# Altium PCB Main.PcbDoc (part 1 of 2)
Units mm, origin at the board's own origin, x right, y up, seen from the top; angles counter-clockwise.
Board outline 55 x 61 mm, 2 copper layers (Top Layer, Bottom Layer); 103 components, 75 nets, 531 pads, 187 vias.
Unrouted connection lines stored in the file: 83.
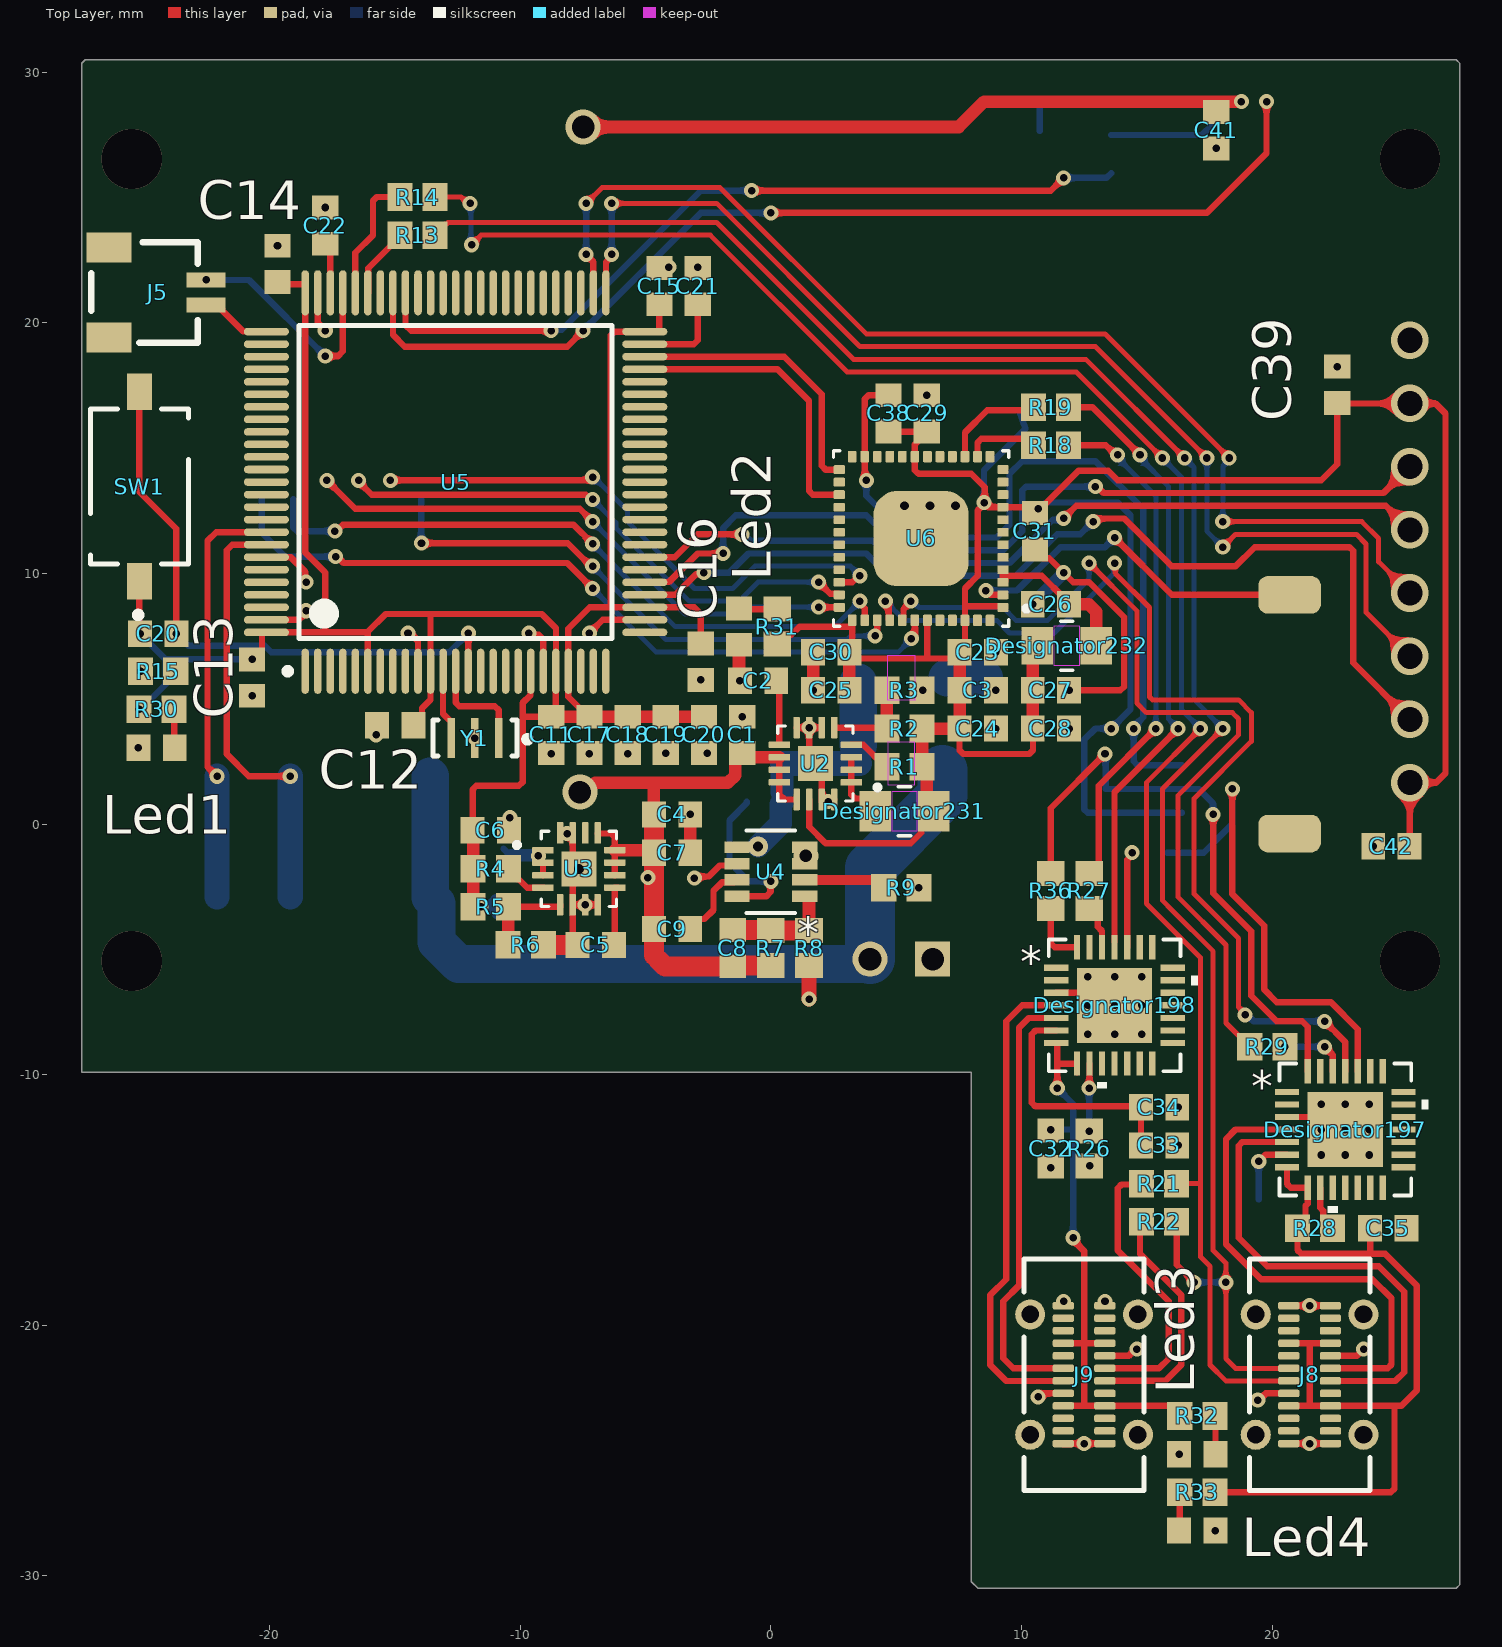
[diagram p0: Top Layer view]
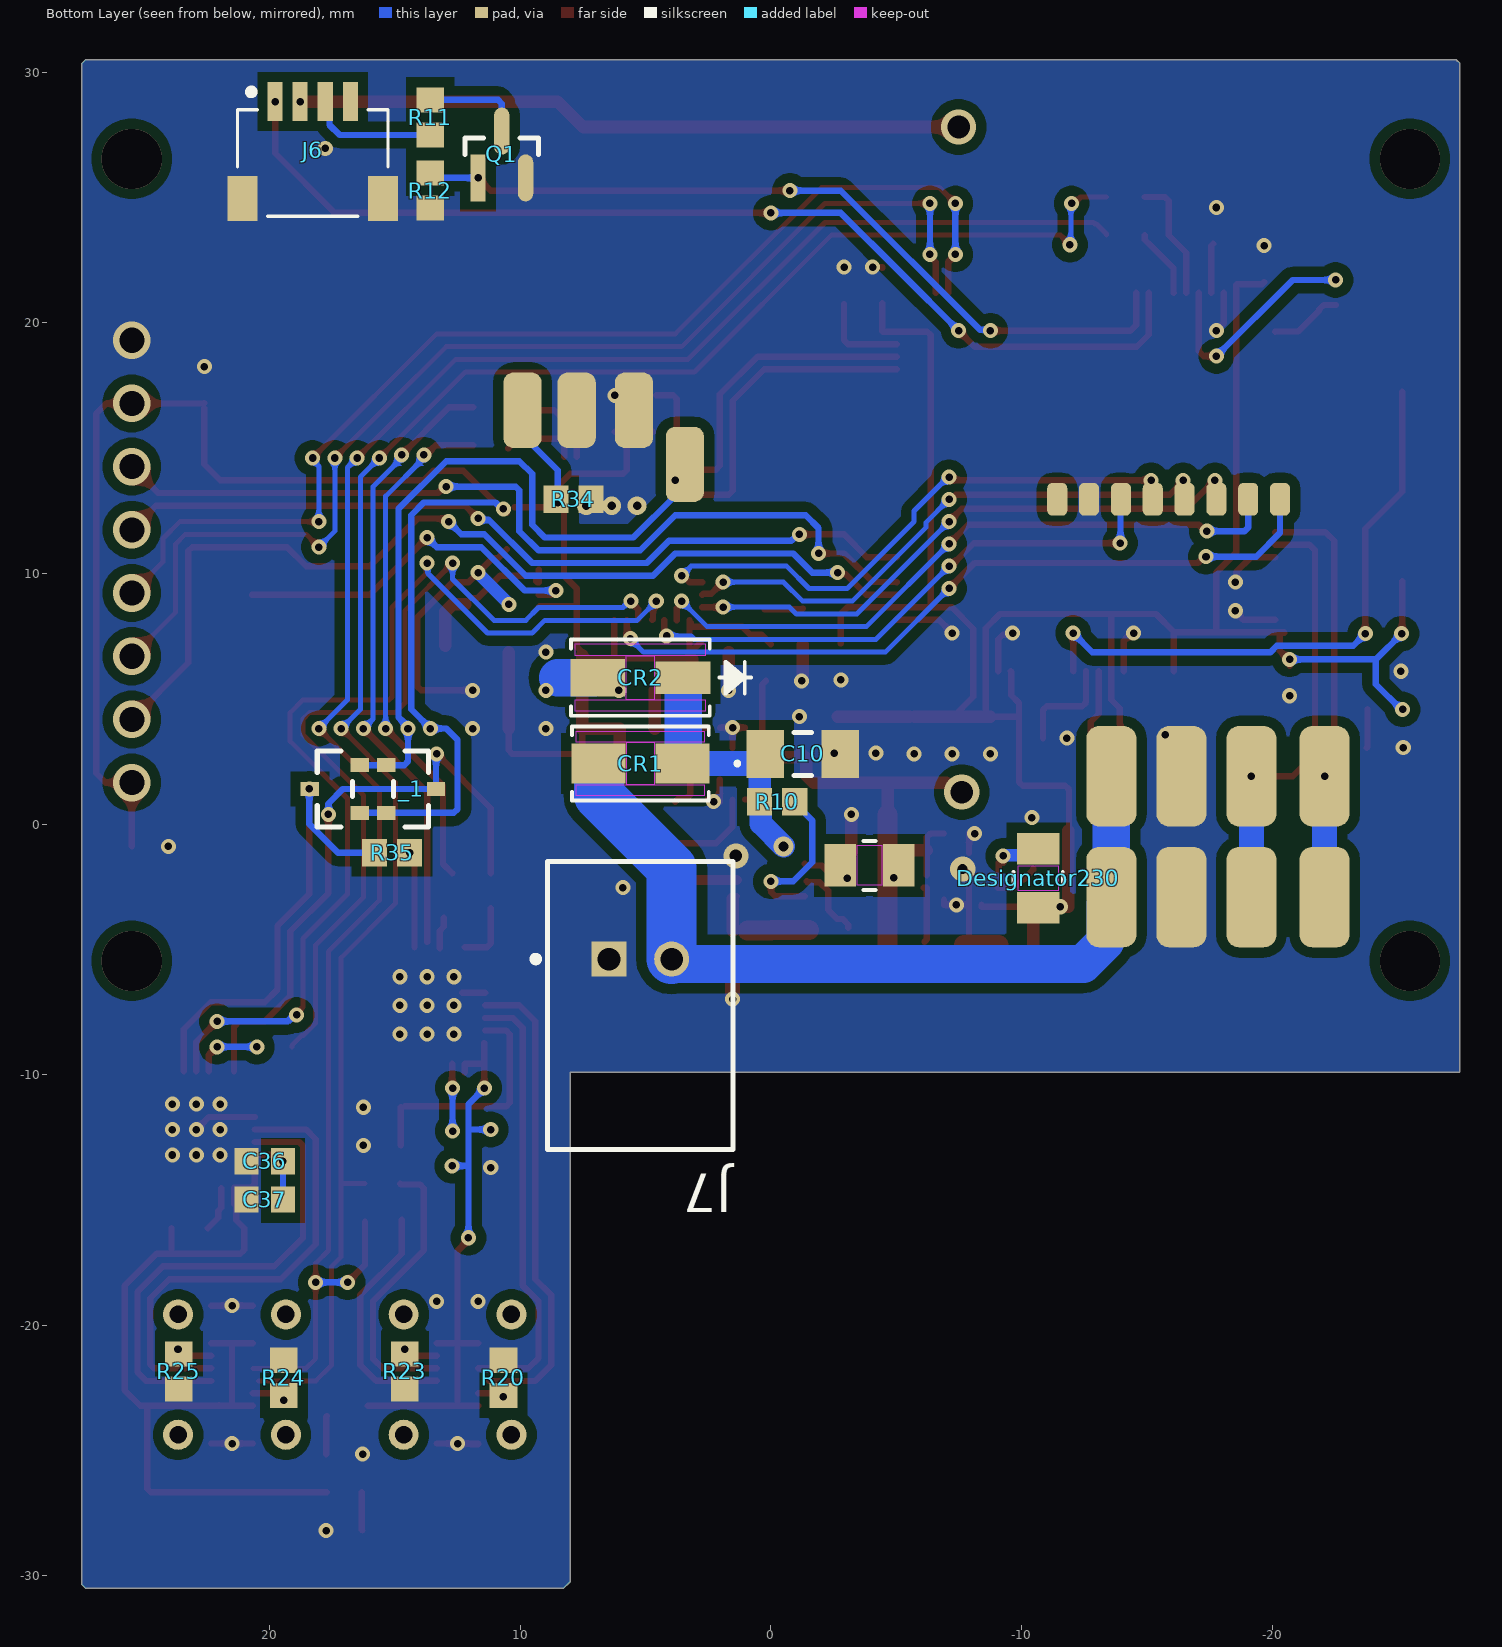
[diagram p1: Bottom Layer view, seen from below]

## Layer stack, top to bottom
Top Solder: solder mask 0.0102, Solder Resist, Dk 3.5
Top Layer: signal copper 0.0356
Dielectric 1: dielectric 0.32, FR-4, Dk 4.8
Bottom Layer: signal copper 0.0356
Bottom Solder: solder mask 0.0102, Solder Resist, Dk 3.5

## Board outline
-27.5,-9.906 8.001,-9.906 8.001,-30.234 8.267,-30.5 27.351,-30.5 27.5,-30.351 27.5,30.351 27.351,30.5 -27.353,30.5 -27.5,30.353

## Design rules (kind name [scope] priority, off if disabled: settings)
Clearance [All] p1: gap=0 ignorepadtopadclearanceinfootprint=TRUE
PolygonConnect [All] p1: connectstyle=Direct reliefconductorwidth=0.254 reliefentries=4 polygonreliefangle="90 Angle" airgapwidth=0.254
RoutingVias [All] p1: holewidth=0.711 width=1.27 viastyle="Through Hole" minholewidth=0 minwidth=0 maxholewidth=5 maxwidth=5
SolderMaskExpansion [All] p1: expansion=0.102 istentingtop=FALSE
Width [All] p1: maxlimit=5 minlimit=0.1 preferedwidth=0.254
30 further rules are at their usual default settings.

## Classes and differential pairs
component class Main: 0 C1 C2 C3 C4 C5 C6 C7 C8 C9 C11 C12 C13 C14 C15 C16 C17 C19 C20 C21 C22 C23 C24 C25 C26 C27 C28 C29 C30 C31 C32 C33 C34 C36 C37 CR2 J5 J6 J7 Q1 R1 R2 R3 R4 R5 R6 R7 R8 R9 R10 R11 R12 R13 R14 R15 R18 R19 R20 R21 R22 R23 R24 R25 R26 R27 R28 R29 SW1 U2 U3 U4 U5 U6 Y1

## Components (designator, comment, footprint, x,y, rotation, side; value= is the part's Value field where it differs from the comment)
_1 "Comment" FP-S-03946-MFG 14.351,1.397 r180 bottom
C1 "10uF" CAPC1608X90X35ML10T15 -1.143,3.556 r270 top
C2 "3.3nF" CAPC1608X90X35ML10T15 -0.508,5.715 r0 top
C3 "22uF" CAPC1608X90X35ML10T15 8.255,5.334 r180 top
C4 "100uF" CAPC1608X90X35ML10T15 -3.937,0.381 r180 top
C5 "3.3nF" CAPC1608X90X35ML10T15 -6.985,-4.826 r0 top
C6 "22uF" CAPC1608X90X35ML10T15 -11.176,-0.254 r180 top
C7 "0.1uF" CAPC1608X90X35ML10T15 -3.937,-1.143 r180 top
C8 "12pF" CAPC1608X90X35ML10T15 -1.524,-4.953 r270 top
C9 "10nF" CAPC1608X90X35ML10T15 -3.937,-4.191 r180 top
C10 "Comment" KEMT-1206-2_M -1.27,2.794 r180 bottom
C11 "0.1uF" CAPC1608X90X35ML10T15 -8.763,3.556 r90 top
C12 "0.1uF" CAPC1608X90X35ML10T15 -14.986,3.937 r0 top
C13 "0.1uF" CAPC1608X90X35ML10T15 -20.701,5.842 r90 top
C14 "0.1uF" CAPC1608X90X35ML10T15 -19.685,22.352 r270 top
C15 "0.1uF" CAPC1608X90X35ML10T15 -4.445,21.463 r270 top
C16 "0.1uF" CAPC1608X90X35ML10T15 -2.794,6.477 r90 top
C17 "1uF" CAPC1608X90X35ML10T15 -7.239,3.556 r90 top
C18 "0.1uF" CAPC1608X90X35ML10T15 -5.715,3.556 r90 top
C19 "1uF" CAPC1608X90X35ML10T15 -4.191,3.556 r90 top
C20 "0.1uF" CAPC1608X90X35ML10T15 -2.667,3.556 r90 top
C20 "0.1uF" CAPC1608X90X35ML10T15 -24.446,7.595 r180 top
C21 "0.1uF" CAPC1608X90X35ML10T15 -2.921,21.463 r270 top
C22 "0.1uF" CAPC1608X90X35ML10T15 -17.78,23.876 r270 top
C23 "0.1uF" CAPC1608X90X35ML10T15 8.255,6.858 r0 top
C24 "0.1uF" CAPC1608X90X35ML10T15 8.255,3.81 r0 top
C25 "0.1uF" CAPC1608X90X35ML10T15 2.413,5.334 r180 top
C26 "0.1uF" CAPC1608X90X35ML10T15 11.176,8.763 r0 top
C27 "1uF" CAPC1608X90X35ML10T15 11.176,5.334 r180 top
C28 "0.1uF" CAPC1608X90X35ML10T15 11.176,3.81 r180 top
C29 "0.1uF" CAPC1608X90X35ML10T15 6.223,16.383 r270 top
C30 "0.1uF" CAPC1608X90X35ML10T15 2.413,6.858 r0 top
C31 "1uF" CAPC1608X90X35ML10T15 10.541,11.684 r90 top
C32 "1uF" CAPC1608X90X35ML10T15 11.176,-12.954 r270 top
C33 "4.7uF" CAPC1608X90X35ML10T15 15.494,-12.827 r180 top
C34 "0.1uF" CAPC1608X90X35ML10T15 15.494,-11.303 r180 top
C35 "1uF" CAPC1608X90X35ML10T15 24.638,-16.129 r0 top
C36 "4.7uF" CAPC1608X90X35ML10T15 20.193,-13.462 r180 bottom
C37 "0.1uF" CAPC1608X90X35ML10T15 20.193,-14.986 r180 bottom
C38 "0.1uF" CAPC1608X90X35ML10T15 4.699,16.383 r270 top
C39 "4.7uF" CAPC1608X90X35ML10T15 22.606,17.526 r90 top
C41 "100uF" CAPC1608X90X35ML10T15 17.78,27.686 r270 top
C42 "4.7uF" CAPC1608X90X35ML10T15 24.765,-0.889 r0 top
CR1 "SS54-HF" SDO_DO-214AC_CIP 5.207,2.413 r0 bottom
CR2 "SMAJ30CA" SMASeries_LTF 5.207,5.842 r0 bottom
Designator197 "Comment" QFN28_5X5_SIL 22.924,-12.192 r0 top
Designator198 "Comment" QFN28_5X5_SIL 13.716,-7.239 r0 top
Designator230 "Comment" IND_EPCOS_B82498F_EPC#1 -10.668,-2.159 r90 bottom
Designator231 "Comment" IND_EPCOS_B82498F_EPC#2 5.334,0.508 r0 top
Designator232 "Comment" IND_EPCOS_B82498F_EPC#3 11.811,7.112 r0 top
J5 "Debug" SM02B-SRSS-TB(LF)(SN) -24.511,21.209 r270 top
J6 "SM04B-SRSS-TB(LF)(SN)" JST_SM04B-SRSS-TB(LF)(SN) 18.28,28.829 r180 bottom
J7 "S2B-XH-A-1(LF)(SN)" FP-S2B-XH-A-1_LF_SN-MFG 5.207,-7.239 r0 bottom
J8 "USB-TYPE-C-STAND" USB-TYPE-C-STAND 21.5,-21.971 r90 top
J9 "USB-TYPE-C-STAND" USB-TYPE-C-STAND 12.5,-21.971 r270 top
Led1 "22uF" CAPC1608X90X35ML10T15 -24.511,3.048 r0 top
Led2 "0.1uF" CAPC1608X90X35ML10T15 -1.27,7.874 r90 top
Led3 "1uF" CAPC1608X90X35ML10T15 17.018,-25.146 r0 top
Led4 "1uF" CAPC1608X90X35ML10T15 17.018,-28.194 r0 top
Q1 "IRFML8244TRPBF" FP-PG-SOT23-3-IPC_A 10.734,26.716 r90 bottom
R1 "100K" RESC1608X55X30ML20T20 5.334,2.286 r0 top
R2 "680K" RESC1608X55X30ML20T20 5.334,3.81 r180 top
R3 "130K" RESC1608X55X30ML20T20 5.334,5.334 r180 top
R4 "100K" RESC1608X55X30ML20T20 -11.176,-1.778 r180 top
R5 "680K" RESC1608X55X30ML20T20 -11.176,-3.302 r0 top
R6 "130K" RESC1608X55X30ML20T20 -9.779,-4.826 r180 top
R7 "110K" RESC1608X55X30ML20T20 0,-4.953 r270 top
R8 "15K" RESC1608X55X30ML20T20 1.524,-4.953 r90 top
R9 "47k" RESC1608X55X30ML20T20 5.207,-2.54 r180 top
R10 "47K" RESC1608X55X30ML20T20 -0.254,0.889 r0 bottom
R11 "22R" RESC1608X55X30ML20T20 13.589,28.194 r90 bottom
R12 "22R" RESC1608X55X30ML20T20 13.589,25.273 r270 bottom
R13 "22R" RESC1608X55X30ML20T20 -14.097,23.495 r180 top
R14 "22R" RESC1608X55X30ML20T20 -14.097,25.019 r180 top
R15 "10K" RESC1608X55X30ML20T20 -24.446,6.096 r0 top
R18 "0R" RESC1608X55X30ML20T20 11.176,15.113 r0 top
R19 "0R" RESC1608X55X30ML20T20 11.176,16.637 r0 top
R20 "5.1k" RESC1608X55X30ML20T20 10.668,-22.098 r90 bottom
R21 "0R" RESC1608X55X30ML20T20 15.494,-14.351 r180 top
R22 "0R" RESC1608X55X30ML20T20 15.494,-15.875 r180 top
R23 "5.1k" RESC1608X55X30ML20T20 14.605,-21.844 r90 bottom
R24 "5.1k" RESC1608X55X30ML20T20 19.431,-22.098 r90 bottom
R25 "5.1k" RESC1608X55X30ML20T20 23.622,-21.844 r90 bottom
R26 "4.7k" RESC1608X55X30ML20T20 12.7,-12.954 r90 top
R27 "200R" RESC1608X55X30ML20T20 12.7,-2.667 r90 top
R28 "4.7k" RESC1608X55X30ML20T20 21.717,-16.129 r0 top
R29 "200R" RESC1608X55X30ML20T20 19.812,-8.89 r180 top
R30 "130K" RESC1608X55X30ML20T20 -24.511,4.572 r180 top
R31 "130K" RESC1608X55X30ML20T20 0.254,7.874 r90 top
R32 "130K" RESC1608X55X30ML20T20 17.018,-23.622 r0 top
R33 "130K" RESC1608X55X30ML20T20 17.018,-26.67 r0 top
R34 "0R" RESC1608X55X30ML20T20 7.874,12.954 r0 bottom (schematic designator R19)
R35 "0R" RESC1608X55X30ML20T20 15.113,-1.143 r0 bottom (schematic designator R21)
R36 "200R" RESC1608X55X30ML20T20 11.176,-2.667 r90 top (schematic designator R27)
SW1 "PTS636 SKG25 SMTR LFS" FP-PTS636_SKG25_SMTR_LFS-MFG -25.195,13.467 r90 top
U2 "TLV62130RGTR" QFN50P300X300X100-17N#1 1.778,2.413 r180 top
U3 "TLV62130RGTR" QFN50P300X300X100-17N#2 -7.658,-1.79 r0 top
U4 "SY8303AIC" TSOT_303AIC_SGY 0,-1.905 r180 top
U5 "STM32F407VET6" STM-LQFP100_N -12.579,13.646 r90 top
U6 "ESP32-PICO-D4" PQFN50P700X700X104-49N 5.997,11.393 r180 top
Y1 "" FP-CSTCE_V-MFG -11.811,3.429 r180 top
? "Comment" FP-S-03946-MFG 17.399,1.397 r0 bottom
? "Comment" IND_EPCOS_B82498F_EPC#1 -3.937,-1.651 r180 bottom

## Footprints (in the part's own frame and the unit in brackets; to place one, negate y for a bottom-side part, rotate by r counter-clockwise, add the part's x,y. Pads: shape width x height; smd on the part's side, far side on the other; paste and mask are expansions set on the pad)
CAPC1608X90X35ML10T15 [mm] "Chip Capacitor, 2-Leads, Body 1.60x0.80mm, IPC Low Density"
  rect 0.95x1.05 smd: 1(-0.725,0) 2(0.725,0)
  body extent -0.85,-0.45 0.85,0.45, height 0.9
FP-CSTCE_V-MFG [mm]
  rect 0.3x1.6 smd paste+0 mask+0: 1(-0.95,0) 2(0,0) 3(0.95,0)
  silkscreen extent -2.23,-0.72 1.68,0.72, body extent -1.78,-0.9 1.78,0.9, height 0.25
FP-PG-SOT23-3-IPC_A [mm]
  rect 1.874x0.612 smd paste+0 mask+0: 1(-0.935,0.95)
  rrect100% 1.874x0.612 smd paste+0 mask+0: 2(-0.935,-0.95) 3(0.935,0)
  silkscreen extent 0,-1.46 0.65,1.46, body extent -1.18,-1.46 1.18,1.46, height 1.12
FP-PTS636_SKG25_SMTR_LFS-MFG [mm]
  rect 1.45x1 smd paste+0 mask+0: 1(-3.775,0) 2(3.775,0)
  silkscreen extent -5.25,-1.95 3.1,1.95, body extent -4.6,-2.05 4.6,2.05, height 0.25
FP-S2B-XH-A-1_LF_SN-MFG [mm]
  rect 1.4x1.4 hole 0.9 paste-1000 mask+0: 1(1.25,-1.85)
  round 1.4 hole 0.9 paste-1000 mask+0: 2(-1.25,-1.85)
  silkscreen extent -3.7,-5.75 4.3,5.75, body extent -3.7,-5.75 3.7,5.75, height 5.99
FP-S-03946-MFG [mil]
  rect 29x22 smd paste+0 mask+0: 1(-39,37.5) 2(-39,-37.5) 3(39,0)
  silkscreen extent -28,-60 28,60, body extent -47,-57 47,57, height 44
IND_EPCOS_B82498F_EPC#1 [mil]
  rect 49.5x67 smd paste+0 mask+0: 1(-46.25,0) 2(46.25,0)
  Top Layer keep-out region: -19.5,-31.5 -19.5,31.5 19.5,31.5 19.5,-31.5
  silkscreen extent -9,-38 9,38, body extent -46,-34 46,34, height 55
IND_EPCOS_B82498F_EPC#2 [mil]
  rect 49.5x62.99 smd paste+0 mask+0: 1(-46.25,0) 2(46.25,0)
  Top Layer keep-out region: -19.5,-31.5 -19.5,31.5 19.5,31.5 19.5,-31.5
  silkscreen extent -9,-38 9,38, body extent -46,-34 46,34, height 55
IND_EPCOS_B82498F_EPC#3 [mil]
  rect 49.5x59.06 smd paste+0 mask+0: 1(-46.25,0) 2(46.25,0)
  Top Layer keep-out region: -19.5,-31.5 -19.5,31.5 19.5,31.5 19.5,-31.5
  silkscreen extent -9,-38 9,38, body extent -46,-34 46,34, height 55
JST_SM04B-SRSS-TB(LF)(SN) [mm]
  rect 0.6x1.55 smd: 1(-1.5,0) 2(-0.5,0) 3(0.5,0) 4(1.5,0)
  rect 1.2x1.8 smd: S1(-2.8,-3.875) S2(2.8,-3.875)
  silkscreen extent -3,-4.57 3,0.48
KEMT-1206-2_M [mm] "SMD, 2-Leads, Body 3.4x1.8mm, IPC Low Density"
  rect 1.5x1.9 smd: 1(-1.5,0) 2(1.5,0)
  silkscreen extent -0.35,-0.85 0.35,0.85, body extent -1.7,-0.9 1.7,0.9, height 0.88
PQFN50P700X700X104-49N [mm]
  rrect25% 0.45x0.35 smd: 1(-3.265,2.75) 2(-3.265,2.25) 3(-3.265,1.75) 4(-3.265,1.25) 5(-3.265,0.75) 6(-3.265,0.25) 7(-3.265,-0.25) 8(-3.265,-0.75) 9(-3.265,-1.25) 10(-3.265,-1.75) 11(-3.265,-2.25) 12(-3.265,-2.75) 25(3.265,-2.75) 26(3.265,-2.25) 27(3.265,-1.75) 28(3.265,-1.25) 29(3.265,-0.75) 30(3.265,-0.25) 31(3.265,0.25) 32(3.265,0.75) 33(3.265,1.25) 34(3.265,1.75) 35(3.265,2.25) 36(3.265,2.75)
  rrect25% 0.35x0.45 smd: 13(-2.75,-3.265) 14(-2.25,-3.265) 15(-1.75,-3.265) 16(-1.25,-3.265) 17(-0.75,-3.265) 18(-0.25,-3.265) 19(0.25,-3.265) 20(0.75,-3.265) 21(1.25,-3.265) 22(1.75,-3.265) 23(2.25,-3.265) 24(2.75,-3.265) 37(2.75,3.265) 38(2.25,3.265) 39(1.75,3.265) 40(1.25,3.265) 41(0.75,3.265) 42(0.25,3.265) 43(-0.25,3.265) 44(-0.75,3.265) 45(-1.25,3.265) 46(-1.75,3.265) 47(-2.25,3.265) 48(-2.75,3.265)
  rrect50% 3.8x3.8 smd paste-4: 49(0,0)
  silkscreen extent -4.3,-3.5 3.5,3.5
QFN28_5X5_SIL [mil]
  rect 38x10 smd paste+0 mask+0: 1(-91.5,59.06) 2(-91.5,39.37) 3(-91.5,19.68) 4(-91.5,0) 5(-91.5,-19.68) 6(-91.5,-39.37) 7(-91.5,-59.06) 15(91.5,-59.06) 16(91.5,-39.37) 17(91.5,-19.68) 18(91.5,0) 19(91.5,19.68) 20(91.5,39.37) 21(91.5,59.06)
  rect 10x38 smd paste+0 mask+0: 8(-59.06,-91.5) 9(-39.37,-91.5) 10(-19.69,-91.5) 11(0,-91.5) 12(19.69,-91.5) 13(39.37,-91.5) 14(59.06,-91.5) 22(59.06,91.5) 23(39.37,91.5) 24(19.69,91.5) 25(0,91.5) 26(-19.69,91.5) 27(-39.37,91.5) 28(-59.06,91.5)
  rect 118.11x118.11 smd paste-66 mask+0: 29(0,0)
  silkscreen extent -104,-130 130,104, body extent -99,-99 99,99, height 39
QFN50P300X300X100-17N#1 [mm]
  rrect25% 0.86x0.26 smd: 1(-1.435,0.75) 2(-1.435,0.25) 3(-1.435,-0.25) 4(-1.435,-0.75) 9(1.435,-0.75) 10(1.435,-0.25) 11(1.435,0.25) 12(1.435,0.75)
  rrect25% 0.26x0.86 smd: 5(-0.75,-1.435) 6(-0.25,-1.435) 7(0.25,-1.435) 8(0.75,-1.435) 13(0.75,1.435) 14(0.25,1.435) 15(-0.25,1.435) 16(-0.75,1.435)
  rect 1.4x1.4 smd paste-2: 17(0,0)
  round 0.4 smd mask+0: 18(0,0)
  oval 0x0.4 smd mask+0: 19(-0.58,0.58) 20(0.58,0.58) 21(-0.58,-0.58) 22(0.58,-0.58)
  silkscreen extent -2.57,-1.5 1.5,1.5
QFN50P300X300X100-17N#2 [mm]
  rrect25% 0.86x0.26 smd: 1(-1.435,0.75) 2(-1.435,0.25) 3(-1.435,-0.25) 4(-1.435,-0.75) 9(1.435,-0.75) 10(1.435,-0.25) 11(1.435,0.25) 12(1.435,0.75)
  rrect25% 0.26x0.86 smd: 5(-0.75,-1.435) 6(-0.25,-1.435) 7(0.25,-1.435) 8(0.75,-1.435) 13(0.75,1.435) 14(0.25,1.435) 15(-0.25,1.435) 16(-0.75,1.435)
  rect 1.4x1.4 smd paste-2: 17(0,0)
  oval 0x0.4 smd mask+0: 18(0,0)
  silkscreen extent -2.57,-1.5 1.5,1.5
RESC1608X55X30ML20T20 [mm] "Chip Resistor, 2-Leads, Body 1.60x0.80mm, IPC Low Density"
  rect 1x1.1 smd: 1(-0.7,0) 2(0.7,0)
  body extent -0.9,-0.5 0.9,0.5, height 0.55
SDO_DO-214AC_CIP [mil]
  rect 85x63 smd paste+0 mask+0: 1(-66,0) 2(66,0)
  Top Layer keep-out region: -21.5,-33.5 -21.5,33.5 21.5,33.5 21.5,-33.5
  Top Layer keep-out region: -100.5,33.5 -100.5,51 100.5,51 100.5,33.5
  Top Layer keep-out region: -100.5,-51 -100.5,-33.5 100.5,-33.5 100.5,-51
  Keep-Out Layer region: -21.5,-33.5 -21.5,33.5 21.5,33.5 21.5,-33.5
  silkscreen extent -155,-58 108,58, body extent -103,-53 103,53, height 89
SM02B-SRSS-TB(LF)(SN) [mm]
  rect 0.6x1.55 smd: 1(-0.5,1.975) 2(0.5,1.975)
  rect 1.2x1.8 smd: 3(-1.8,-1.9) 4(1.8,-1.9)
  silkscreen extent -2,-2.6 2,1.65
SMASeries_LTF [mil]
  rect 86x51.18 smd paste+0 mask+0: 1(-67,0)
  rect 86x59.06 smd paste+0 mask+0: 2(67,0)
  Top Layer keep-out region: -22,-34.5 -22,34.5 22,34.5 22,-34.5
  Top Layer keep-out region: -102,34.5 -102,53 102,53 102,34.5
  Top Layer keep-out region: -102,-53 -102,-34.5 102,-34.5 102,-53
  Keep-Out Layer region: -22,-34.5 -22,34.5 22,34.5 22,-34.5
  silkscreen extent -174,-60 109,60, body extent -104,-55 104,55, height 92
STM-LQFP100_N [mm] "Thin QFP, 100-Leads, Body 14x14mm, Pitch 0.5mm, IPC Medium Density"
  oval 1.8x0.3 smd: 1(-7.55,6) 2(-7.55,5.5) 3(-7.55,5) 4(-7.55,4.5) 5(-7.55,4) 6(-7.55,3.5) 7(-7.55,3) 8(-7.55,2.5) 9(-7.55,2) 10(-7.55,1.5) 11(-7.55,1) 12(-7.55,0.5) 13(-7.55,0) 14(-7.55,-0.5) 15(-7.55,-1) 16(-7.55,-1.5) 17(-7.55,-2) 18(-7.55,-2.5) 19(-7.55,-3) 20(-7.55,-3.5) 21(-7.55,-4) 22(-7.55,-4.5) 23(-7.55,-5) 24(-7.55,-5.5) 25(-7.55,-6) 51(7.55,-6) 52(7.55,-5.5) 53(7.55,-5) 54(7.55,-4.5) 55(7.55,-4) 56(7.55,-3.5) 57(7.55,-3) 58(7.55,-2.5) 59(7.55,-2) 60(7.55,-1.5) 61(7.55,-1) 62(7.55,-0.5) 63(7.55,0) 64(7.55,0.5) 65(7.55,1) 66(7.55,1.5) 67(7.55,2) 68(7.55,2.5) 69(7.55,3) 70(7.55,3.5) 71(7.55,4) 72(7.55,4.5) 73(7.55,5) 74(7.55,5.5) 75(7.55,6)
  oval 0.3x1.8 smd: 26(-6,-7.55) 27(-5.5,-7.55) 28(-5,-7.55) 29(-4.5,-7.55) 30(-4,-7.55) 31(-3.5,-7.55) 32(-3,-7.55) 33(-2.5,-7.55) 34(-2,-7.55) 35(-1.5,-7.55) 36(-1,-7.55) 37(-0.5,-7.55) 38(0,-7.55) 39(0.5,-7.55) 40(1,-7.55) 41(1.5,-7.55) 42(2,-7.55) 43(2.5,-7.55) 44(3,-7.55) 45(3.5,-7.55) 46(4,-7.55) 47(4.5,-7.55) 48(5,-7.55) 49(5.5,-7.55) 50(6,-7.55) 76(6,7.55) 77(5.5,7.55) 78(5,7.55) 79(4.5,7.55) 80(4,7.55) 81(3.5,7.55) 82(3,7.55) 83(2.5,7.55) 84(2,7.55) 85(1.5,7.55) 86(1,7.55) 87(0.5,7.55) 88(0,7.55) 89(-0.5,7.55) 90(-1,7.55) 91(-1.5,7.55) 92(-2,7.55) 93(-2.5,7.55) 94(-3,7.55) 95(-3.5,7.55) 96(-4,7.55) 97(-4.5,7.55) 98(-5,7.55) 99(-5.5,7.55) 100(-6,7.55)
  silkscreen extent -7.67,-6.25 6.25,6.82, body extent -7,-7 7,7, height 1.6
TSOT_303AIC_SGY [mil]
  rect 39.5x18 smd paste+0 mask+0: 1(-53.25,38.39) 2(-53.25,12.8) 3(-53.25,-12.8) 4(-53.25,-38.39) 5(53.25,-38.39) 6(53.25,-12.8) 7(53.25,12.8) 8(53.25,38.39)
  silkscreen extent -39,-65 39,65, body extent -59,-60 59,60, height 43
USB-TYPE-C-STAND [mm]
  rrect50% 0.3x0.85 smd: A1(-2.75,0.83) A2(-2.25,0.83) A3(-1.75,0.83) A4(-1.25,0.83) A5(-0.75,0.83) A6(-0.25,0.83) A7(0.25,0.83) A8(0.75,0.83) A9(1.25,0.83) A10(1.75,0.83) A11(2.25,0.83) A12(2.75,0.83) B1(2.75,-0.83) B2(2.25,-0.83) B3(1.75,-0.83) B4(1.25,-0.83) B5(0.75,-0.83) B6(0.25,-0.83) B7(-0.25,-0.83) B8(-0.75,-0.83) B9(-1.25,-0.83) B10(-1.75,-0.83) B11(-2.25,-0.83) B12(-2.75,-0.83)
  round 1.2 hole 0.7: S1(-2.4,2.15) S2(2.4,2.15) S3(-2.4,-2.15) S4(2.4,-2.15)
  silkscreen extent -4.62,-2.4 4.62,2.4, body extent -4.52,-2.3 4.52,2.3, height 7.39

## Part data
C1 C2 C3 C4 C5 C6 C7 C8 C9 C11 C12 C13 C14 C15 C16 C17 C18 C19 C20 C20 C21 C22 C23 C24 C25 C26 C27 C28 C29 C30 C31 C32 C33 C34 C35 C36 C37 C38 C39 C41 C42 Led1 Led2 Led3 Led4: library part CMP-2006-02924-1, Manufacturer=Murata, PART NUMBER=GRM188R71H472KA01D
C10: library part CMP-2006-02924-1
CR1: "No Description Available", Mfr_Name=Comchip, Type="Diodes - Rectifiers, Single"
CR2: "No Description Available", Mfr_Name="Littelfuse Inc"
J5: library part SM02B-SRSS-TB(LF)(SN), "Connector Header Surface Mount, Right Angle 2 position 0.039 _1.00mm_", Package=None, Availability=Unavailable, MF="JST Sales", MP=SM02B-SRSS-TB_LF__SN_, Price=None, SnapEDA_Link=https://www.snapeda.com/parts/SM02B-SRSS-TB%28LF%29%28SN%29/JST%20Sales%20America%20Inc./view-part/447499/?ref=snap
J6: "SH Series 1.0 mm Pitch 2 Position Single Row Side Entry Shrouded Header", Package=None, Availability=Unavailable, MP=SM04B-SRSS-TB(LF)(SN), Price=None
J7: library part CMP-17439-000260-1, "CONN HEADER R/A 2POS 2.5MM", Flammability Rating="UL94 V-0", Insulation Color=Natural, Max Operating Temperature=85°C, Min Operating Temperature=-25°C, Voltage Rating=250V, Connector Type=Header, Contact Finish - Mating=TIN, Contact Material=Brass, Contact Shape=Square, Contact Type="Male Pin", Fastening Type=Detent, Insulation Material=Nylon, Lead Free="Lead Free", Mount="Through Hole", Number of Positions=2, Number of Rows=1, Packaging=Bulk, Series=XH, Termination=Press-Fit
J8 J9: Package=None, Availability=Unavailable, DigiKey-Purchase-URL=https://snapeda.com/shop?store=DigiKey&id=3596593, MF="Wurth Electronics", MP=632722110112, Price=None, SnapEDA_Link=https://www.snapeda.com/parts/632722110112/Wurth%20Electronics%20Inc./view-part/3596593/?ref=snap
Q1: library part CMP-00196-65874012-1, "IRFML8244TRPBF Trans MOSFET N-CH 25V 5.8A 3-Pin SOT-23 T/R - Product that comes on tape, but is not reeled", Case/Package=SOT-23, Continuous Drain Current (ID)=5.8A, Drain to Source Breakdown Voltage=25V, Drain to Source Resistance=41mΩ, Gate to Source Voltage (Vgs)=20V, Input Capacitance=430pF, Manufacturer Package Identifier=Micro3, Max Junction Temperature (Tj)=150°C, Max Power Dissipation=1.25W, Min Operating Temperature=-55°C, On-State Resistance=24mΩ, Package Quantity=3000, Resistance=41MΩ, Threshold Voltage=1.7V, Drain to Source Voltage (Vdss)=25V, Element Configuration=Single, Fall Time=2.9ns, Height=1.02mm, Lead Free="Lead Free", Length=3.04mm, Lifecycle Status=Production, Max Operating Temperature=150°C, Mount="Surface Mount", NexarPartId=65874012, Nominal Vgs=1.7V, Number of Elements=1, Number of Pins=3, Packaging="Tape & Reel", Power Dissipation=1.25W, Radiation Hardening=No, Rds On Max=24mΩ, REACH SVHC="No SVHC", Recovery Time=17ns, Rise Time=2.1ns, RoHS=Compliant, Schedule B="8541290080, 8541290080", Turn-Off Delay Time=9ns, Turn-On Delay Time=2.7ns, Width=1.4mm
R1 R2 R3 R4 R5 R6 R7 R8 R9 R10 R11 R12 R13 R14 R15 R18 R19 R20 R21 R22 R23 R24 R25 R26 R27 R28 R29 R30 R31 R32 R33 R34 R35 R36: library part CMP-2000-00054-1, Manufacturer=Panasonic, PART NUMBER=ERA3AEB392V
SW1: library part CMP-10040-000025-1, "TACT 6.0 X 3.5, 2.5 MM H, 250GF,"
U2 U3: "3-17V 3A Step-Down Converter in 3x3 QFN Package 16-VQFN -40 to 85", Package="VQFN-16 Texas Instruments", Availability=Unavailable, DigiKey-Purchase-URL=https://snapeda.com/shop?store=DigiKey&id=423292, MF="Texas Instruments", Mouser-Purchase-URL=https://snapeda.com/shop?store=Mouser&id=423292, MP=TLV62130RGTR, Price=None, SnapEDA_Link=https://www.snapeda.com/parts/TLV62130RGTR/Texas%20Instruments/view-part/423292/?ref=snap, Texas_Instruments-Purchase-URL=https://snapeda.com/shop?store=Texas+Instruments&id=423292
U4: "No Description Available", Mfr_Name=Silergy, RefDes=RefDes, Type=Type
U5: "ARM Cortex-M4 32-bit MCU+FPU, 210 DMIPS, 512 kB Flash, 192 kB Internal RAM, 82 I/Os, 100-pin LQFP, -40 to 85 degC, Tray", I/Os (High Current)=82, Manufacturer=STMicroelectronics, Operating Frequency(F) (Processor speed) (MHz)=168, Supplier Part Number 1=497-12075-ND, Supply Voltage(Vcc) max (V)=3.6, Supply Voltage(Vcc) min (V)=1.8, ComponentLink1Description="Manufacturer URL", ComponentLink1URL=http://www.st.com/web/en/home.html, ComponentLink2Description=Datasheet, ComponentLink2URL=http://www.st.com/st-web-ui/static/active/en/resource/technical/document/datasheet/DM00037051.pdf, ComponentLink3Description="Package Specification", ComponentLink3URL=http://www.st.com/st-web-ui/static/active/en/resource/technical/document/data_brief/DM00071938.pdf, Core="ARM Cortex-M4", D/A Converter=2x12-bit, DatasheetVersion="Rev. 4", FLASH Size (Prog) (kB)=512, Internal RAM Size (kB)=192, Mounting Technology="Surface Mount", PackageDescription="100-Pin Low Profile Quad Flat Package, 14 x 14 mm Body, 0.5 mm Pitch", PackageReference=LQFP100, PackageVersion="Rev. 1, 06/2013", Packing=Tray, PartNumber=STM32F407VET6, Supplier 1=Digi-Key, Supplier 2=Farnell, Supplier 3=Newark, Supplier 4=Mouser, Supplier Part Number 2=2064367, Supplier Part Number 3=73T2332, Supplier Part Number 4=511-STM32F407VET6
U6: "Bluetooth, WiFi 802.11b/g/n, Bluetooth v4.2 +EDR, Class 1, 2 and 3 Transceiver Module 2.4GHz ~ 2.5GHz Surface Mount", Package=None, Availability=Unavailable, MP=ESP32-PICO-D4, Price=None
Y1: library part CMP-06057-000013-1, "CERAMIC RES 20.0000MHZ 15PF SMD", Capacitance=15pF, Case/Package=SMD/SMT, Frequency=20MHz, Frequency Stability=0.3%, Frequency Tolerance=0.5%, Max Operating Temperature=80°C, Min Operating Temperature=-20°C, Package Quantity=3000, Resistor Type=Ceramic, Contact Plating=Gold, Height=0.039inch, Impedance=40R, Lead Free="Lead Free", Length=0.126inch, Load Capacitance=15pF, Mount="Surface Mount", Number of Pins=3, Packaging="Tape and Reel", REACH SVHC="No SVHC", Self Resonant Frequency=20MHz, Termination=SMD/SMT, Tolerance=0.5%, Width=0.051inch

## Free pads (board coordinates)
  rrect50% 2x4 smd far side: 2(-22.098,-2.921) 2(-22.098,1.905) 2(-19.177,-2.921) 2(-19.177,1.905) 2(-16.383,-2.921) 2(-16.383,1.905) 2(-13.589,-2.921) 2(-13.589,1.905)
  rrect50% 0.8x1.3 smd far side: 3(-20.32,12.954) 3(-19.05,12.954) 3(-17.78,12.954) 3(-16.51,12.954) 3(-15.24,12.954) 3(-13.97,12.954) 3(-12.7,12.954) 3(-11.43,12.954)
  rrect50% 1.524x3 smd far side: 4(3.429,14.351) 4(5.461,16.51) 4(7.747,16.51) 4(9.906,16.51)
  rrect50% 2.5x1.5 smd: 5(20.701,-0.381) 5(20.701,9.144)

## Via types
v1: diameter 0.6, hole 0.3, Top Layer to Bottom Layer, 167 vias
v2: diameter 1.5, hole 1, Top Layer to Bottom Layer, 8 vias
v3: diameter 2.4, hole 2.4, Top Layer to Bottom Layer, 4 vias
v4: diameter 0.75, hole 0.35, Top Layer to Bottom Layer, 3 vias
v5: diameter 1.4, hole 0.9, Top Layer to Bottom Layer, 2 vias
v6: diameter 1, hole 0.4, Top Layer to Bottom Layer, 1 vias
v7: diameter 0.8, hole 0.4, Top Layer to Bottom Layer, 1 vias
v8: diameter 1, hole 0.5, Top Layer to Bottom Layer, 1 vias

## Nets (pads, with @x,y where several pads share a name; then routed paths per layer and width w, separated by ;. In a path a pad name is that pad's centre, name@x,y a point inside that pad or via, vN(x,y) a via of type N, cw(c..) or ccw(c..) an arc to the next point about the centre after c; other vN are vias at no path point)
BOOT: ?.2@16.408,2.349 _1.1 C38.1 pad.4@3.429,14.351 U6.23 | length 32
  Top Layer w0.254: v1(3.81,13.716) 3.747,13.779 U6.23 3.747,16.959 3.896,17.108 C38.1@4.572,17.108
  Bottom Layer w0.254: v1(3.81,13.716) 3.81,13.103 5.483,11.43 9.017,11.43 9.525,11.938 9.525,13.97 10.033,14.478 12.954,14.478 14.859,12.573 14.859,4.259 14.478,3.878 v1(14.478,3.81) 14.478,2.498 14.627,2.349 _1.1 ?.2@16.408,2.349
CAN2_RX: 
CAN2_TX: 
CANH: 
CANL: 
DO: J6.4
DTR: _1.3 Designator197.28 Designator198.28 R36.1 R36.2 | length 26.9
  Top Layer w0.254: R36.1 11.176,-4.766 11.325,-4.915 Designator198.28 ; R36.2 11.176,0.635 v1(13.335,2.794) ; v1(17.653,0.381) 17.653,-2.757 19.177,-4.281 19.177,-6.858 20.193,-7.874 21.209,-7.874 21.424,-8.089 Designator197.28
  Bottom Layer w0.254: v1(13.335,2.794) 13.36,2.769 _1.3 17.079,1.397 17.646,0.829 17.646,0.388 v1(17.653,0.381)
DTR_2: 
ESP_EN: ?.1@16.408,0.445 _1.2 C3.2 C23.1 C24.1 C25.1 C27.2 C28.2 C29.2 C30.2 C31.2 C38.2 C39.1 C42.2 Designator231.2 Designator232.1 pad.4@9.906,16.51 R1.2 R2.1 R31.1 R34.2 U2.14 U6.1 U6.9 U6.19 U6.37 U6.43 U6.46 | length 114.7
  Top Layer w0.254: R31.1@0,7.174 0.373,7.547 0.816,7.547 1.143,7.874 3.175,7.874 3.247,7.802 ; U2.14 1.528,-0.105 2.185,-0.762 5.588,-0.762 6.007,-0.343 6.007,-0.089 Designator231.2@6.223,0.127 ; C30.2@2.79,7.256 3.138,6.908 C30.2 3.247,6.967 3.247,7.802 ; C30.2@3.138,6.567 C30.2@3.175,6.604 ; C30.2@3.138,6.604 C30.2@3.175,6.604 ; U6.37@3.199,8.03 U6.37@3.247,8.078 ; U6.37 U6.37@3.247,8.078 ; C30.2@3.302,6.731 C30.2@3.175,6.604 ; C38.2 C29.2 ; C29.2@5.842,15.24 5.747,15.145 U6.19 5.747,14.119 5.896,13.97 8.001,13.97 8.538,13.433 v1@8.538,12.798 ; 6.247,6.753 U6.43 ; C24.1 7.53,2.943 7.679,2.794 10.312,2.794 10.46,2.943 10.46,3.801 C28.2 ; 7.896,8.691 9.214,8.691 U6.1 ; v1(8.509,12.827) 8.509,12.759 8.255,12.505 8.255,9.906 7.747,9.398 U6.46 7.747,7.075 C23.1 7.276,6.604 C30.2@3.175,6.604 ; v1@8.681,12.643 U6.9 C31.2@10.23,12.643 ; C31.2 10.541,12.446 v1(10.668,12.573) ; C39.1@22.606,16.593 22.606,14.351 21.971,13.716 13.843,13.716 13.462,14.097 12.279,14.097 10.939,12.757 C31.2@10.755,12.573 ; C39.1 22.625,16.782 v2(25.5,16.782) 26.525,16.782 26.924,16.383 26.924,2.032 26.543,1.651 v2(25.5,1.651) 25.5,-0.879 C42.2 ; 3.247,7.802 U6.37@3.247,8.078 ; v1(10.668,12.573) C31.2@10.755,12.573 ; v1(10.668,12.573) C31.2@10.755,12.573
  Top Layer w0.5: C25.1 C30.2@3.138,6.567 ; Designator231.2@6.509,0.381 6.223,0.667 6.223,2.097 R1.2 R2.1 C24.1 C3.2 C23.1@7.53,6.731 ; C28.2 C27.2 Designator232.1@10.451,6.858
  Bottom Layer w0.254: v1(8.509,12.827) 8.509,14.117 10.16,15.768 pad.4@9.906,16.51 ; v1(10.668,12.573) 10.736,12.573 10.99,12.827 13.843,12.827 14.351,12.319 14.351,4.572 v1(13.589,3.81) 12.954,3.81 12.5,3.356 12.5,0.593 12.649,0.445 _1.2 ?.1@16.408,0.445
ESP_RXD: Designator197.25 U6.40 | length 41.6
  Top Layer w0.2: v1(13.716,10.414) 13.75,10.38 13.75,9.999 15.113,8.636 15.113,5.07 15.23,4.953 18.669,4.953 19.177,4.445 19.177,3.302 16.891,1.016 16.891,-2.794 18.669,-4.572 18.669,-7.303 18.923,-7.557 v1(18.923,-7.62)
  Top Layer w0.254: v1(4.572,8.89) 4.572,8.796 4.699,8.669 4.699,8.176 U6.40@4.728,8.147 ; v1(22.098,-7.874) 22.924,-8.699 Designator197.25
  Bottom Layer w0.2: v1(4.572,8.89) 5.334,8.128 9.017,8.128 9.525,7.62 11.303,7.62 13.682,9.999 13.682,10.38 v1(13.716,10.414)
  Bottom Layer w0.254: v1(18.923,-7.62) 19.017,-7.62 19.271,-7.874 v1(22.098,-7.874)
ESP_RXD_2: Designator198.25 R19.2 | length 24.6
  Top Layer w0.254: R19.2 12.827,16.637 v1(14.732,14.732) ; Designator198.25@13.716,-4.707 13.716,1.27 v1(16.256,3.81)
  Bottom Layer w0.2: v1@14.732,14.605 15.875,13.462 15.875,4.191 v1(16.256,3.81)
ESP_TXD: R29.2 U6.41 | length 35.5
  Top Layer w0.2: v1(12.7,10.414) 14.605,8.509 14.605,4.826 14.986,4.445 18.415,4.445 18.669,4.191 18.669,3.556 16.256,1.143 16.256,-2.921 18.161,-4.826 18.161,-7.939 18.662,-8.44 18.712,-8.44 19.112,-8.84 R29.2
  Top Layer w0.254: U6.41@5.295,8.176 5.295,8.568 v1@5.588,8.861
  Bottom Layer w0.2: v1(5.588,8.89) 5.651,8.89 5.905,8.636 9.271,8.636 9.779,8.128 11.049,8.128 12.7,9.779 v1(12.7,10.414)
ESP_TXD_2: R18.2 R27.2 | length 20.4
  Top Layer w0.254: R18.2 13.368,15.113 13.749,14.732 v1(13.843,14.732) ; R27.2 12.708,-1.967 13.081,-1.594 13.081,1.524 v1(15.367,3.81)
  Bottom Layer w0.2: v1@13.843,14.605 15.367,13.081 v1(15.367,3.81)
GND: C1.1 C2.1 C3.1 C4.1 C5.1 C6.1 C7.1 C10.2 C11.1 C12.1 C13.1 C14.1 C15.1 C16.1 C17.1 C18.1 C19.1 C20.1@-2.667,2.831 C21.1 C22.1 C23.2 C24.2 C25.2 C26.1 C27.1 C28.1 C29.1 C30.1 C31.1 C32.2 C33.1 C34.1 C35.2 C36.1 C37.1 C39.2 C41.2 C42.1 CR2.2 Designator197.3 Designator197.29 Designator198.3 Designator198.29 J6.S1 J6.S2 J7.1 J8.A1 J8.A12 J8.B1 J8.B12 J9.A1 J9.A12 J9.B1 J9.B12 Led1.1 Led2.1 Led3.1 Led4.2 pad.2@-16.383,1.905 pad.2@-16.383,-2.921 pad.3@-12.7,12.954 pad.4@5.461,16.51 pad.4@7.747,16.51 Q1.2 R3.1 R6.1 R8.1 R9.1 R12.2 R15.1 R20.2 R23.1 R24.2 R25.1 R34.1 U2.6 U2.7 U2.8 U2.15 U2.16 U2.17 U3.6 U3.7 U3.8 U3.15 U3.16 U3.17 U4.3 U4.4 U5.10 U5.20 U5.27 U5.74 U5.94 U5.99 U6.49 Y1.2 | length 50.1
  Top Layer w0.254: U5.99 -18.851,8.146 -18.542,8.455 v1(-18.542,8.509) ; U5.94 -20.12,10.637 -19.146,10.637 -18.588,10.079 -18.588,9.698 v1(-18.542,9.652) ; U5.74 -18.079,19.994 -17.78,19.695 v1(-17.78,19.685) ; v1(-14.478,7.62) -14.388,7.62 -14.079,7.311 U5.10 ; v1(-9.652,7.62) -9.586,7.554 -9.256,7.554 -9.079,7.377 U5.20 ; v1(-8.128,-0.381) -7.911,-0.381 -7.908,-0.378 U3.15 U3.17@-7.908,-1.143 ; U3.17@-7.717,-1.731 U3.17@-7.565,-1.579 ; C5.1 -7.908,-4.628 U3.6 ; v6(-7.658,-1.79) -7.908,-2.04 U3.6 ; v1(-7.239,7.62) -6.713,8.146 U5.27 ; U3.8 U3.8@-6.911,-3.225 ; U3.8@-6.908,-3.014 -6.908,-3.222 U3.8@-6.911,-3.225 ; C15.1 C15.1@-4.408,22.225 ; C15.1@-4.445,22.225 v1(-4.064,22.225) ; U2.8 v1(1.528,3.848) ; U2.17@1.528,3.048 v1(1.528,3.848) ; U2.6 v1(1.528,3.848) ; U2.17@2.032,1.778 2.032,1.408 2.031,1.407 2.031,0.981 U2.15 2.028,0.892 2.031,0.889 v1(2.286,0.889) ; v1@2.286,0.978 U2.16 ; C31.1 10.889,10.611 11.106,10.611 12.065,9.652 12.7,9.652 14.097,8.255 14.097,5.483 13.948,5.334 v1(11.901,5.334) ; Designator198.3 Designator198.29@12.319,-6.739 ; J9.B1@11.67,-24.743 11.671,-24.744 J9.B1@11.968,-24.744 ; J9.B1 J9.A12 ; J9.B12 11.67,-19.064 v1(11.684,-19.05) ; Designator197.3 22.424,-11.692 v1(22.924,-12.192) ; J8.A1 J8.B12 ; J8.A12 J8.B1 ; U3.6 v1(-7.408,-3.225) U3.8@-6.911,-3.225
  Top Layer w0.5: C7.1 v1(-3.212,0.381) ; Led2.1 -1.27,5.752 v1(-1.233,5.715) ; v1(1.688,5.334) C30.1
  Top Layer w0.6: v1(1.524,-6.985) R8.1
  Top Layer w0.8: R6.1 C5.1
  Bottom Layer w0.254: v1(10.451,8.763) v1@10.47,8.782
  Bottom Layer w0.5: v1@10.47,8.782 10.47,8.8 11.684,10.015 v1(11.684,10.033)
  Bottom Layer w1.5: CR2.2@7.036,5.842 8.509,5.842
  other v1: 17.743,-28.194 16.293,-25.146 12.5,-24.721 21.5,-24.721 21.5,-19.221 13.335,-19.05 11.176,-13.716 21.971,-13.208 22.924,-13.208 23.876,-13.208 16.256,-12.827 21.971,-12.192 23.876,-12.192 16.256,-11.303 21.971,-11.176 22.924,-11.176 23.876,-11.176 12.646,-8.382 13.716,-8.382 14.805,-8.382 12.646,-7.239 13.716,-7.239 14.805,-7.239 12.646,-6.096 13.716,-6.096 14.805,-6.096 5.907,-2.54 24.04,-0.889 -10.414,0.254 -8.763,2.794 -7.239,2.794 -5.715,2.794 -4.191,2.831 -2.54,2.831 -25.236,3.048 -11.811,3.429 -15.748,3.556 8.98,3.81 11.901,3.81 -1.143,4.281 -20.701,5.117 6.066,5.334 8.98,5.334 -2.794,5.752 -25.146,6.096 8.98,6.858 6.223,17.108 22.606,18.251 -2.921,22.225 -19.685,23.077 -17.78,24.601 17.78,26.961
  other v2: 25.5,19.304
  other v4: 5.334,12.7 6.35,12.7 7.366,12.7
  other v8: 1.397,-1.27
GND_LED: J6.3 R11.1 | length 5.2
  Bottom Layer w0.254: R11.1 17.207,27.494 17.608,27.895 17.608,28.657 J6.3
NC: 
NetC1_2: 
NetC2_2: C2.2 U2.9 | length 2.6
  Top Layer w0.254: C2.2@0.194,5.715 0.343,5.566 U2.9
NetC4_2: 
NetC5_2: C5.2 U3.9 | length 2.3
  Top Layer w0.254: C5.2@-6.13,-4.699 -6.223,-4.606 -6.223,-2.543 -6.22,-2.54 -6.106,-2.54 U3.9@-6.103,-2.537
NetC8_1: C8.1 R7.1 R8.2 U4.1 | length 4.1
  Top Layer w0.254: U4.1 1.422,-2.88 U4.1@1.524,-2.982
  Top Layer w0.5: R7.1@0,-4.38 R7.1@0.133,-4.247 ; R8.2 U4.1@1.524,-2.982
  Top Layer w0.8: C8.1 R7.1@-0.025,-4.228 ; R7.1 0.927,-4.253
NetC9_1: C9.1 U4.7 | length 2.9
  Top Layer w0.254: C9.1@-3.085,-4.141 -3.085,-4.014 -2.864,-3.793 -2.65,-3.793 -2.286,-3.429 -2.286,-2.667 -1.951,-2.332 -1.477,-2.332 U4.7@-1.432,-2.286
NetC20_1: C20.1@-23.721,7.595 R15.2 SW1.2 U5.14 | length 24.1
  Top Layer w0.254: SW1.2 -25.195,13.257 -23.721,11.783 v1(-23.721,7.595) ; U5.14 -12.072,6.103 -12.072,7.613 v1(-12.065,7.62)
  Bottom Layer w0.254: v1(-23.721,7.595) -23.238,7.112 -20.193,7.112 -19.939,6.858 -12.827,6.858 v1(-12.065,7.62)
NetC20_2: 
NetC21_2: C21.2 U5.49 | length 3.6
  Top Layer w0.254: U5.49 -3.079,19.146 -2.921,19.304 C21.2
NetC22_2: C22.2 U5.73 | length 2
  Top Layer w0.254: C22.2@-17.653,23.151 -17.579,23.077 U5.73
NetC26_2: C26.2 Designator232.2 U6.3 U6.4 | length 6
  Top Layer w0.254: U6.3 9.312,9.643 9.36,9.691 U6.3@9.36,9.741 ; U6.3@9.262,9.671 9.262,9.907 ; U6.4 9.262,9.907 ; C26.2@11.938,9.017 11.697,9.017 10.807,9.907 9.262,9.907
  Top Layer w0.5: C26.2@12.192,8.763 12.693,8.763 12.986,8.47 Designator232.2
NetC33_2: C33.2 C34.2 Designator198.6 | length 9.5
  Top Layer w0.254: Designator198.6 10.563,-8.239 10.414,-8.388 10.414,-11.121 10.563,-11.27 C34.2@14.605,-11.27 ; C33.2 C34.2
NetC36_2: C36.2 C37.2 Designator197.6 | length 2.8
  Top Layer w0.254: v1(19.47,-13.462) 19.74,-13.192 Designator197.6
  Bottom Layer w0.254: C37.2 v1(19.47,-13.462) v1(19.47,-13.462)
NetJ1_A5: J9.A5 R23.2 | length 1.4
  Top Layer w0.254: J9.A5 14.283,-21.221 14.549,-20.955 v1(14.605,-20.955)
NetJ1_A6: J9.A6 R21.2 | length 11.4
  Top Layer w0.254: J9.A6 15.49,-21.721 15.875,-21.336 15.875,-19.05 13.843,-17.018 13.843,-14.535 13.992,-14.386 14.759,-14.386 R21.2
NetJ1_A7: J9.A7 R22.2 | length 9.8
  Top Layer w0.254: J9.A7 15.752,-22.221 16.383,-21.59 16.383,-18.796 14.732,-17.145 R22.2@14.732,-15.787
NetJ1_B5: J9.B5 R20.1 | length 1.1
  Top Layer w0.254: v1(10.668,-22.86) 10.762,-22.86 10.901,-22.721 J9.B5
NetJ2_A5: J8.A5 R24.1 | length 1.3
  Top Layer w0.254: v1(19.431,-22.987) 19.487,-22.987 19.753,-22.721 J8.A5
NetJ2_B5: J8.B5 R25.2 | length 1.5
  Top Layer w0.254: J8.B5 23.389,-21.221 v1(23.655,-20.955) v1@23.6,-20.955
NetL1_2: Designator231.1 U2.1 U2.2 U2.3 | length 2.2
  Top Layer w0.254: U2.3 U2.2 U2.1 3.213,1.168 3.362,1.02 3.679,1.02 Designator231.1@3.81,0.889
NetL2_2: Designator230.2 U3.1 U3.2 U3.3 | length 2.5
  Top Layer w0.254: v1(-9.271,-1.27) -9.271,-1.537 -9.268,-1.54 U3.2 U3.3
  Bottom Layer w0.254: Designator230.2 Designator230.2@-10.382,-1.27
  Bottom Layer w0.5: Designator230.2@-10.382,-1.27 -10.363,-1.251 -9.29,-1.251 v1(-9.271,-1.27)
NetL3_1: ?.1@-2.762,-1.651 U4.6 | length 1.9
  Top Layer w0.254: v1(-3.048,-2.159) -2.982,-2.093 -2.474,-2.093 -2.037,-1.656 -1.429,-1.656 U4.6
NetQ1_3: Q1.3 R11.2 | length 4
  Bottom Layer w0.254: Q1.3@10.735,27.652 10.735,28.745 10.884,28.894 R11.2
NetR1_1: R1.1 U2.4 | length 1.7
  Top Layer w0.254: U2.4 3.216,3.16 3.683,3.16 4.507,2.336 R1.1@4.507,2.286
NetR2_2: R2.2 R3.2 U2.5 | length 3.6
  Top Layer w0.254: U2.5 4.596,3.848 R2.2
  Top Layer w0.5: R2.2 R3.2
NetR4_1: R4.1 U3.4 | length 1.8
  Top Layer w0.254: R4.1 -10.476,-1.828 -10.103,-2.201 -10.053,-2.201 -9.714,-2.54 U3.4@-9.059,-2.54
NetR5_2: R5.2 R6.2 U3.5 | length 3.3
  Top Layer w0.254: R5.2 -8.411,-3.302 -8.408,-3.299 U3.5
  Top Layer w0.5: R6.2@-10.476,-4.826 R5.2@-10.476,-3.649
NetR9_2: R9.2 U4.2 | length 3.3
  Top Layer w0.4: U4.2 4.197,-2.23 R9.2
NetR10_1: R10.1 U4.8 | length 6.5
  Top Layer w0.254: U4.8 -0.171,-2.88 -0.016,-2.725 -0.016,-2.302 v1(0,-2.286)
  Bottom Layer w0.254: R10.1 -0.954,0.839 -1.651,0.142 -1.651,-1.524 -0.889,-2.286 v1(0,-2.286)
NetR16_1: U6.28
NetR17_1: U6.29
NetR18_1: R18.1 U6.14 | length 3
  Top Layer w0.254: U6.14 8.247,15.218 8.396,15.367 10.103,15.367 10.476,14.994 R18.1@10.476,14.986
NetR19_1: R19.1 U6.15 | length 4.1
  Top Layer w0.254: U6.15 7.747,15.621 8.636,16.51 R19.1@10.476,16.51
NetR26_2: Designator198.9 R26.2 | length 2.8
  Top Layer w0.254: v1@12.634,-10.475 v1(12.7,-10.541) 12.716,-10.525 Designator198.9
  Bottom Layer w0.254: v1(12.7,-12.254) v1(12.7,-10.541)
NetR27_1: Designator198.26 R27.1 | length 1.3
  Top Layer w0.254: R27.1@13.047,-3.74 13.047,-4.099 13.216,-4.268 Designator198.26@13.216,-4.957
NetR28_2: Designator197.9 R28.2 | length 1.8
  Top Layer w0.254: Designator197.9@21.923,-14.532 21.923,-15.319 22.044,-15.44 22.044,-15.706 R28.2@22.467,-16.129
NetR29_1: Designator197.26 R29.1 | length 2.7
  Top Layer w0.254: v1(22.098,-8.89) 22.424,-9.216 Designator197.26
  Bottom Layer w0.254: v1(20.512,-8.89) v1(22.098,-8.89)
NetR?_1: 
NetR?_2: 
NetU5_12: U5.12 Y1.3 | length 2.8
  Top Layer w0.254: U5.12 -13.079,4.397 -12.761,4.079 Y1.3
NetU5_13: U5.13 Y1.1 | length 4.2
  Top Layer w0.254: U5.13 -12.579,4.848 -12.43,4.699 -11.01,4.699 -10.861,4.55 Y1.1
RTS: ?.3 Designator197.24 Designator198.24 R35.1 R35.2 | length 22.9
  Top Layer w0.254: Designator198.24 14.216,-1.434 v1@14.413,-1.237 ; v1(18.415,1.397) 18.415,-2.794 19.685,-4.064 19.685,-6.604 20.193,-7.112 22.352,-7.112 23.423,-8.183 Designator197.24
  Bottom Layer w0.254: R35.2 17.272,-1.143 18.415,0 v1(18.415,1.397) ?.3
  other v1: 14.413,-1.143
RTS_2: 
SPI_MOSI_Screen: pad.3@-17.78,12.954 U5.32 U6.36 | length 55.5
  Top Layer w0.254: v1(-17.719,13.716) -16.576,12.573 -7.62,12.573 v1(-7.112,12.065) ; U5.32 -3.832,10.646 -2.921,11.557 v1(-1.143,11.557) ; v1(1.905,8.655) 1.911,8.649 2.726,8.649 U6.36 ; v1(11.684,12.192) 12.192,12.7 24.538,12.7 v2(25.5,11.738)
  Bottom Layer w0.2: v1(-7.112,12.065) -3.429,8.382 -1.016,8.382 -0.743,8.655 v1(1.905,8.655)
  Bottom Layer w0.254: v1(-1.143,11.557) -1.075,11.557 -0.821,11.303 4.064,11.303 4.953,10.414 9.525,10.414 11.237,12.126 11.618,12.126 v1(11.684,12.192)
SWCLK: J5.2 U5.76 | length 2.9
  Top Layer w0.254: J5.2 -22.061,20.709 -21.888,20.536 -21.888,20.491 -21.052,19.655 -20.138,19.655 U5.76
SWDIO: J5.1 U5.72 | length 9.1
  Top Layer w0.254: v1(-17.78,18.669) -17.272,18.669 -17.079,18.862 U5.72
  Bottom Layer w0.254: v1(-22.536,21.709) -20.82,21.709 v1(-17.78,18.669)
TIM1_CH1: Q1.1 R12.1 U5.67 | length 32.2
  Top Layer w0.254: U5.67 -14.579,19.913 -14.351,19.685 v1(-8.763,19.685) ; v1(-0.762,25.273) 11.176,25.273 v1(11.684,25.781)
  Bottom Layer w0.254: v1(-8.763,19.685) -8.726,19.722 -8.345,19.722 -2.794,25.273 v1(-0.762,25.273) ; v1(11.684,25.781) 13.397,25.781 R12.1
USB_ESP_DM: Designator197.5 J8.B7 | length 19.5
  Top Layer w0.254: Designator197.5 18.818,-12.692 18.669,-12.841 18.669,-16.51 19.812,-17.653 24.257,-17.653 25.273,-18.669 25.273,-21.873 24.921,-22.225 J8.B7@22.33,-22.225
USB_ESP_DM_2: Designator198.5 J9.B7 | length 17.7
  Top Layer w0.254: Designator198.5 10.295,-7.739 9.906,-8.128 9.906,-18.415 9.271,-19.05 9.271,-21.314 9.678,-21.721 J9.B7
USB_ESP_DP: Designator197.4 J8.B6 | length 19.4
  Top Layer w0.254: Designator197.4 18.542,-12.192 18.161,-12.573 18.161,-16.764 19.558,-18.161 24.003,-18.161 24.765,-18.923 24.765,-21.568 24.616,-21.717 J8.B6@22.33,-21.717
USB_ESP_DP_2: Designator198.4 J9.B6 | length 19
  Top Layer w0.254: 11.237,-22.225 9.398,-22.225 8.763,-21.59 8.763,-18.796 9.398,-18.161 9.398,-7.874 10.033,-7.239 Designator198.4
USB_STM_DM: J8.A7 R13.1 R13.2 R22.1 U5.70 | length 82.1
  Top Layer w0.2: R13.1 -13.397,23.545 -12.997,23.945 -12.938,23.945 -12.88,24.003 -2.159,24.003 3.302,18.542 12.573,18.542 v1(16.51,14.605) ; v1(18.034,3.81) 15.621,1.397 15.621,-3.048 16.002,-3.429 17.653,-5.08 17.653,-17.018 18.161,-17.526 v1(18.161,-18.288) 18.161,-21.336 18.546,-21.721 J8.A7
  Top Layer w0.254: U5.70 -16.07,21.205 -16.07,22.172 -15.17,23.072 -14.924,23.318 R13.2@-14.924,23.495 ; R22.1 16.194,-17.591 v1(16.891,-18.288)
  Bottom Layer w0.2: v1(16.51,14.605) 16.891,14.224 16.891,4.953 v1(18.034,3.81)
  Bottom Layer w0.254: v1(16.891,-18.288) v1(18.161,-18.288)
USB_STM_DP: J8.A6 R14.1 R14.2 R21.1 U5.71 | length 82.5
  Top Layer w0.2: R14.1 -12.362,25.019 -12.108,24.765 v1(-12,24.765) ; v1(-11.938,23.114) -11.557,23.495 -2.413,23.495 3.048,18.034 12.192,18.034 v1(15.621,14.605) ; R21.1 17.145,-14.351 ; v1(17.145,3.81) 14.986,1.651 14.986,-3.175 17.145,-5.334 17.145,-14.351 ; J8.A6@20.447,-22.221 18.157,-22.221 17.526,-21.59 17.526,-17.653 17.145,-17.272 17.145,-14.351
  Top Layer w0.254: U5.71 -16.579,22.791 -15.875,23.495 -15.875,24.87 -15.726,25.019 R14.2@-14.924,25.019
  Bottom Layer w0.2: v1(-12,24.765) -11.969,24.734 -11.969,23.145 v1(-11.938,23.114) ; v1(15.621,14.605) 16.383,13.843 16.383,4.572 v1(17.145,3.81)
VCC_3V3_STM: C6.2 C11.2 C12.2 C13.2 C14.2 C15.2 C16.2 C17.2 C18.2 C19.2 C20.2 Designator230.1 pad.3@-11.43,12.954 R4.2 R5.1 R30.2 SW1.1 U3.14 U5.6 U5.11 U5.19 U5.21 U5.22 U5.28 U5.50 U5.75 U5.100 | length 93.8
  Top Layer w0.254: C20.2@-25.195,7.597 SW1.1 ; C13.2@-20.701,6.313 v1(-20.701,6.567) -20.651,6.567 -20.303,6.915 -20.303,7.625 U5.100@-20.324,7.646 ; U5.100@-20.488,7.637 -20.48,7.646 U5.100@-20.324,7.646 ; C14.2 -19.603,21.545 -18.6,21.545 -18.579,21.524 U5.75 -18.579,10.832 -17.78,10.033 -17.78,7.646 ; U5.6 -16.079,7.621 -16.104,7.646 ; C12.2@-13.97,3.937 -13.918,3.989 -13.918,4.624 -13.579,4.963 U5.11 -13.579,8.382 ; C6.2@-11.876,-0.279 C6.2 -11.901,1.375 -11.752,1.524 -10.055,1.524 -9.906,1.673 -9.906,4.281 ; U5.19 -9.588,6.087 -9.588,5.144 -9.906,4.826 -9.906,4.281 ; C17.2 -7.289,4.281 -8.079,5.071 U5.22 -8.079,7.796 -7.229,8.646 -6.389,8.646 ; C15.2@-4.445,20.775 -4.445,19.667 -4.466,19.646 -6.24,19.646 -6.389,19.497 -6.389,8.646 ; C16.2 -2.794,8.382 -3.058,8.646 U5.28 -6.389,8.646 ; U5.100@-20.324,7.646 U5.100 -17.78,7.646 ; -17.78,7.646 -16.104,7.646 ; -16.104,7.646 -15.368,8.382 -13.579,8.382 ; -13.579,8.382 -9.144,8.382 -8.571,7.809 -8.571,6.104 U5.21 -8.579,4.465 C11.2 -9.906,4.281
  Top Layer w0.5: C6.2@-11.876,-0.279 R4.2 R5.1 v1(-11.557,-3.302) ; C11.2 -8.579,4.281 C17.2@-7.289,4.281 ; C17.2 C18.2 ; C18.2@-5.531,4.281 C19.2 C20.2@-2.667,4.281
  Bottom Layer w0.254: v1(-25.211,4.572) -25.146,4.572 -24.143,5.575 -24.143,6.567 ; v1(-25.171,7.595) -24.143,6.567 ; v1(-20.701,6.567) -24.143,6.567 ; Designator230.1@-10.954,-3.048 Designator230.1 Designator230.1@-10.89,-3.556
  Bottom Layer w0.5: v1(-11.557,-3.302) -11.208,-3.302 Designator230.1@-10.954,-3.048 ; Designator230.1@-11.128,-3.318 Designator230.1@-10.89,-3.556
VCC_5V: ?.2@-5.112,-1.651 C1.2 C4.2 C7.2 C8.2 C9.2 C41.1 J6.2 R7.2 U2.10 U2.11 U2.12 U2.13 U3.10 U3.11 U3.12 U3.13 | length 53.5
  Top Layer w0.254: U3.13@-6.905,-0.381 -6.372,-0.381 -6.223,-0.53 U3.12 U3.11 U3.10 ; C7.2@-4.765,-1.04 C7.2 ; -4.675,1.563 -4.67,1.567 -4.587,1.651 ; C1.2@-1.193,2.831 C1.2@-1.025,2.663 ; U2.12 0.343,1.181 0.546,0.978 U2.13 ; 0.343,1.816 U2.11 U2.10
  Top Layer w0.5: v5(-7.62,1.27) -7.376,1.27 -6.995,1.651 -4.587,1.651 -1.711,1.651 -1.418,1.944 -1.418,2.606 C1.2@-1.193,2.831 ; v5(-7.493,27.813) 7.493,27.813 8.509,28.829 v1(18.78,28.829) ; U3.12 C7.2@-4.765,-1.04 ; C4.2@-4.67,0.389 -4.67,1.567 ; C1.2@-1.025,2.663 U2.10
  Top Layer w0.8: -4.662,-2.757 C7.2 C4.2 ; -4.662,-2.737 -4.662,-5.244 -4.406,-5.5 -4.228,-5.678 C8.2 ; C8.2@-1.499,-5.653 R7.2
  other v1: -4.909,-2.141
VCC_24V: C10.1 CR1.1 CR2.1 R10.2 U4.5 | length 8.8
  Bottom Layer w0.9: v7(-0.508,-0.889) 0.396,0.015 0.396,0.789 R10.2@0.446,0.839 ; R10.2@0.446,1.27 C10.1@0.446,2.413
  Bottom Layer w1: C10.1@0.471,2.413 CR1.1
  Bottom Layer w1.5: CR1.1@3.496,3.152 CR2.1@3.496,5.652
VCC_24V_Raw: CR1.2 J7.2 pad.2@-13.589,1.905 pad.2@-13.589,-2.921 | length 33.2
  Bottom Layer w1.5: pad.2@-13.589,1.905 -13.589,-2.921 -13.339,-3.171 -13.339,-4.709 -12.46,-5.588 3.758,-5.588 J7.2
  Bottom Layer w2: J7.2 3.957,-1.758 6.858,1.143 CR1.2@6.858,2.143
VDD3P3_RTC: 
VDD_USB: C32.1 C35.1 Designator197.7 Designator197.8 Designator198.7 Designator198.8 J8.A4 J8.A9 J8.B4 J8.B9 J9.A4 J9.A9 J9.B4 J9.B9 R26.1 R28.1 R32.1 R33.2 | length 58.4
  Top Layer w0.254: v1(11.43,-10.541) 11.434,-10.537 11.434,-9.542 ; Designator198.7@11.434,-8.739 11.434,-9.542 ; J9.B4 12.5,-23.221 ; J9.B9 12.5,-20.721 ; v1(12.065,-16.51) 12.065,-16.603 12.5,-17.038 12.5,-20.721 ; Designator198.8@12.216,-9.919 Designator198.8 11.455,-9.563 11.434,-9.542 ; J9.A4 12.5,-20.721 ; R32.1@16.084,-23.221 J9.A9 12.5,-23.221 ; R33.2 24.736,-26.67 24.885,-26.521 24.885,-23.221 ; Designator197.7 20.599,-14.367 20.748,-14.516 Designator197.8@21.336,-14.516 ; J8.A4 21.5,-23.221 ; J8.A9 21.5,-20.721 ; Designator197.8 21.424,-15.152 21.336,-15.24 21.336,-15.81 R28.1 21.017,-16.996 21.166,-17.145 23.913,-17.145 ; J8.B9@21.971,-23.221 21.5,-23.221 ; J8.B9@22.032,-23.198 22.055,-23.221 J8.B9 24.885,-23.221 ; J8.B4 21.5,-20.721 ; C35.1 23.913,-17.145 ; 12.5,-23.221 12.5,-20.721 ; 21.5,-23.221 21.5,-20.721 ; 23.913,-17.145 24.511,-17.145 25.781,-18.415 25.781,-22.606 25.166,-23.221 24.885,-23.221
  Bottom Layer w0.254: v1(11.176,-12.192) 12.065,-12.192 ; v1(11.43,-10.541) 12.065,-11.176 12.065,-12.192 ; v1(12.065,-16.51) 12.065,-13.64 ; v1(12.717,-13.64) 12.065,-13.64 ; 12.065,-13.64 12.065,-12.192
pads on no net: Designator197.1 Designator197.2 Designator197.10 Designator197.11 Designator197.12 Designator197.13 Designator197.14 Designator197.15 Designator197.16 Designator197.17 Designator197.18 Designator197.19 Designator197.20 Designator197.21 Designator197.22 Designator197.23 Designator197.27 Designator198.1 Designator198.2 Designator198.10 Designator198.11 Designator198.12 Designator198.13 Designator198.14 Designator198.15 Designator198.16 Designator198.17 Designator198.18 Designator198.19 Designator198.20 Designator198.21 Designator198.22 Designator198.23 Designator198.27 J5.3 J5.4 J6.1 J8.A2 J8.A3 J8.A8 J8.A10 J8.A11 J8.B2 J8.B3 J8.B8 J8.B10 J8.B11 J8.S1 J8.S2 J8.S3 J8.S4 J9.A2 J9.A3 J9.A8 J9.A10 J9.A11 J9.B2 J9.B3 J9.B8 J9.B10 J9.B11 J9.S1 J9.S2 J9.S3 J9.S4 Led1.2 Led2.2 Led3.2 Led4.1 R30.1 R31.2 R32.2 R33.1 U2.18 U2.19 U2.20 U2.21 U2.22 U3.18 U5.1 U5.2 U5.3 U5.4 U5.5 U5.7 U5.8 U5.9 U5.15 U5.16 U5.17 U5.18 U5.23 U5.24 U5.25 U5.26 U5.29 U5.30 U5.31 U5.33 U5.34 U5.35 U5.36 U5.37 U5.38 U5.39 U5.40 U5.41 U5.42 U5.43 U5.44 U5.45 U5.46 U5.47 U5.48 U5.51 U5.52 U5.53 U5.54 U5.55 U5.56 U5.57 U5.58 U5.59 U5.60 U5.61 U5.62 U5.63 U5.64 U5.65 U5.66 U5.68 U5.69 U5.77 U5.78 U5.79 U5.80 U5.81 U5.82 U5.83 U5.84 U5.85 U5.86 U5.87 U5.88 U5.89 U5.90 U5.91 U5.92 U5.93 U5.95 U5.96 U5.97 U5.98 U6.2 U6.5 U6.6 U6.7 U6.8 U6.10 U6.11 U6.12 U6.13 U6.16 U6.17 U6.18 U6.20 U6.21 U6.22 U6.24 U6.25 U6.26 U6.27 U6.30 U6.31 U6.32 U6.33 U6.34 U6.35 U6.38 U6.39 U6.42 U6.44 U6.45 U6.47 U6.48
copper on no net: | length 411.1
  Top Layer w0.2: v1(-7.366,24.765) -6.731,25.4 -2.032,25.4 3.81,19.558 13.335,19.558 v1(18.288,14.605) ; v1(-6.35,24.765) -2.159,24.765 3.556,19.05 12.954,19.05 15.202,16.802 v1(17.399,14.605) ; v1(18.034,11.049) 18.542,11.557 23.368,11.557 23.749,11.176 23.749,8.446 v2(25.5,6.695) ; v1(18.034,12.065) 23.581,12.065 24.257,11.389 24.257,10.46 v2(25.5,9.217)
  Top Layer w0.254: -23.811,4.572 -23.811,3.073 -23.786,3.048 ; v1(-22.098,1.905) -22.479,2.286 -22.479,11.303 -22.136,11.646 -20.129,11.646 ; -20.129,11.146 -21.493,11.146 -21.537,11.102 -21.717,10.922 -21.717,2.794 -20.828,1.905 -19.922,1.905 v1(-19.177,1.905) ; v1(-17.399,11.684) -17.331,11.684 -17.077,11.938 -7.874,11.938 v1(-7.112,11.176) ; v1(-17.365,10.668) -17.297,10.668 -17.043,10.414 -8.128,10.414 v1(-7.112,9.398) ; v1@-16.358,13.564 -15.926,13.132 -11.667,13.132 -7.383,13.132 -7.206,12.954 v1(-7.112,12.954) ; v1(-15.179,13.716) -7.333,13.716 -7.206,13.843 v1(-7.112,13.843) ; -15.079,21.196 -15.079,19.524 -14.605,19.05 -8.128,19.05 v1(-7.493,19.685) ; v1@-13.999,11.207 -8.102,11.207 -7.182,10.287 v1(-7.112,10.287) ; v1(-7.366,22.733) -7.366,22.711 -7.079,22.424 -7.079,21.196 ; -6.579,21.196 -6.579,22.41 -6.35,22.639 v1(-6.35,22.733) ; -5.029,9.146 -3.808,9.146 -2.987,9.967 -2.733,9.967 v1(-2.667,10.033) ; -5.029,9.646 -5.02,9.655 -4.061,9.655 -2.921,10.795 v1(-1.905,10.795) ; -5.029,18.146 0.269,18.146 1.524,16.891 1.524,13.292 1.673,13.143 2.732,13.143 ; -5.029,18.646 0.531,18.646 2.032,17.145 2.032,14.292 2.181,14.143 2.732,14.143 ; -1.27,8.599 -1.245,8.574 0.254,8.574 ; v1(0,24.384) 17.399,24.384 19.78,26.765 v1(19.78,28.829) ; v1(1.905,9.652) 2.37,9.187 2.688,9.187 2.732,9.143 ; 2.741,9.652 3.247,9.652 3.501,9.906 v1(3.556,9.906) ; v1(3.556,8.89) 3.556,8.796 3.747,8.605 3.747,8.128 ; v1@4.247,7.579 4.247,8.128 ; v1(5.605,7.398) 5.605,7.491 5.747,7.634 5.747,8.128 ; v1(8.579,9.316) 8.752,9.143 9.262,9.143 ; v1(12.86,12.065) 12.987,12.192 14.097,12.192 16.002,10.287 18.542,10.287 19.304,11.049 23.092,11.049 23.241,10.9 23.241,6.432 v2(25.5,4.173) ; v1(12.954,13.462) 13.022,13.462 13.276,13.208 24.448,13.208 v2(25.5,14.26) ; v1(13.716,11.43) 16.002,9.144 20.701,9.144 ; 16.293,-28.194 16.318,-28.169 16.318,-26.67 ; 17.718,-23.622 17.743,-23.647 17.743,-25.146
  Bottom Layer w0.2: v1(-7.112,9.398) -4.572,6.858 -3.81,6.858 5.08,6.858 5.553,7.331 v1@5.538,7.331 ; v1(-7.112,10.287) -6.423,9.598 -4.191,7.366 3.048,7.366 3.187,7.505 v1(4.16,7.505) ; v1(-7.112,11.176) -3.81,7.874 2.54,7.874 v1(3.556,8.89) ; v1(-7.112,12.954) -6.185,12.027 -6.185,11.823 -3.251,8.89 -1.27,8.89 -0.508,9.652 v1(1.905,9.652) ; v1(-7.112,13.843) -7.072,13.843 -5.715,12.486 -5.715,12.065 -3.048,9.398 -1.524,9.398 -0.635,10.287 3.175,10.287 v1(3.556,9.906) ; v1(17.399,14.605) 17.399,11.684 v1(18.034,11.049) ; v1(18.034,12.065) 18.034,13.092 18.034,14.264 18.288,14.518 v1(18.288,14.605)
  Bottom Layer w0.254: -20.32,12.954 -20.32,11.618 -19.37,10.668 v1(-17.365,10.668) ; -19.05,12.954 -19.05,11.833 -18.901,11.684 v1(-17.399,11.684) ; v1@-13.955,11.222 -13.955,12.939 ; v1(-7.493,19.685) -5.174,22.004 -2.794,24.384 v1(0,24.384) ; v1(-7.366,22.733) v1(-7.366,24.765) ; v1(-6.35,22.733) v1(-6.35,24.765) ; v1(-2.667,10.033) -1.651,10.033 -0.889,10.795 3.81,10.795 4.699,9.906 9.779,9.906 11.43,11.557 11.992,11.557 12.352,11.557 v1(12.86,12.065) ; v1(-1.905,10.795) -1.905,11.811 -1.397,12.319 3.81,12.319 5.207,10.922 9.271,10.922 10.033,11.684 10.033,13.313 10.182,13.462 v1(12.954,13.462) ; v1@5.538,7.331 v1(5.605,7.398) ; v1(8.579,9.316) 9.824,9.316 11.557,11.049 13.335,11.049 v1(13.716,11.43) ; v2@25.276,14.036 v2(25.5,14.26)
  Bottom Layer w1: -22.098,-2.921 v1(-22.098,1.905) ; -19.177,-2.921 v1(-19.177,1.905)
  other v1: -13.939,11.207 -16.449,13.716
  other v3: -25.5,-5.461 25.5,-5.461 -25.5,26.543 25.5,26.543

## Polygon pours and split planes (outlines as drawn)
GND on Bottom Layer "GND_L02_P000" (solid, remove dead copper, pour order 0): -27.5,-9.906 8.001,-9.906 8.001,-30.234 8.267,-30.5 27.351,-30.5 27.5,-30.351 27.5,30.351 27.351,30.5 -27.353,30.5 -27.5,30.353